# EAGLE board SmartGarden (EAGLE 9.6.2)
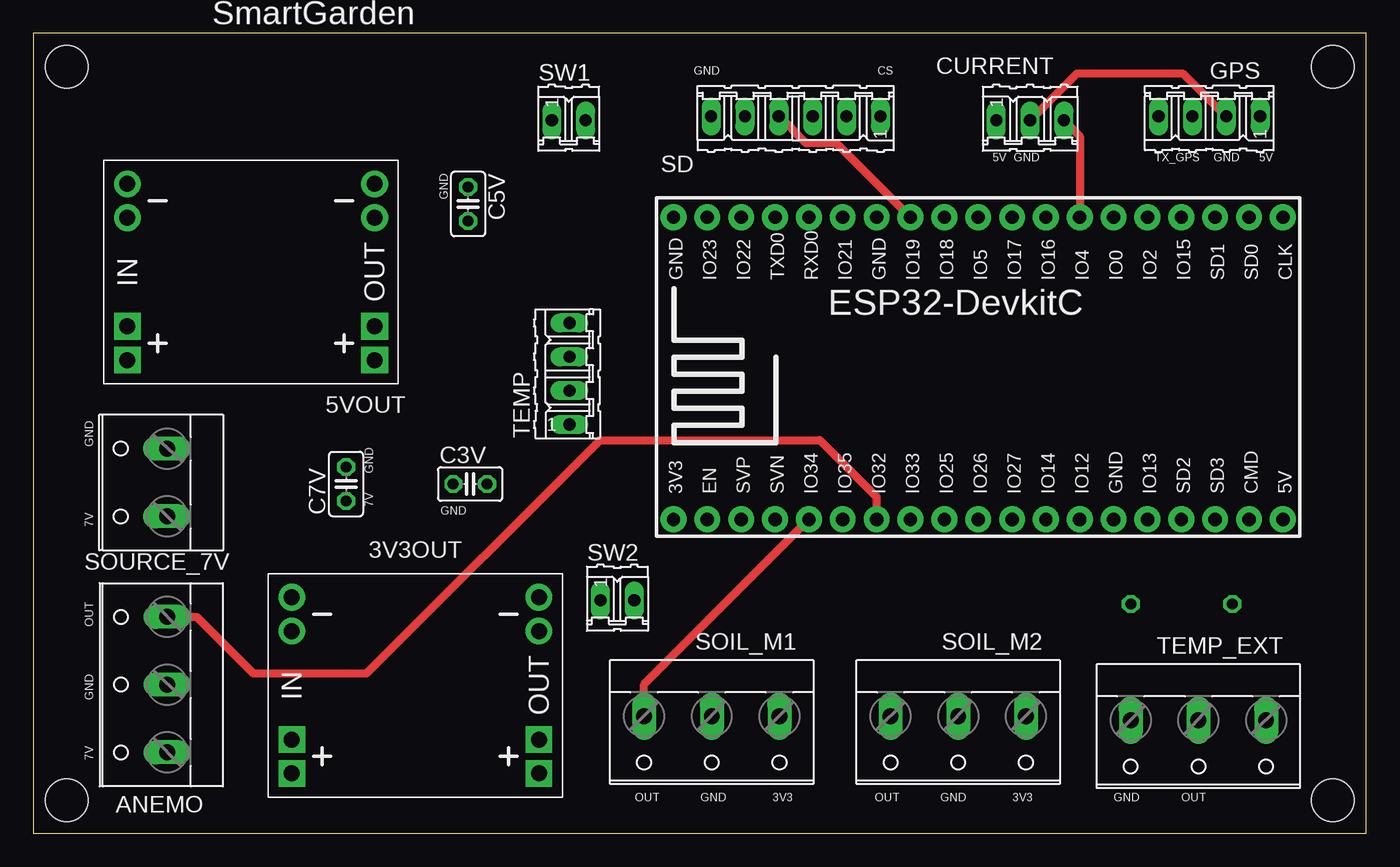
[diagram p0: board, top side]
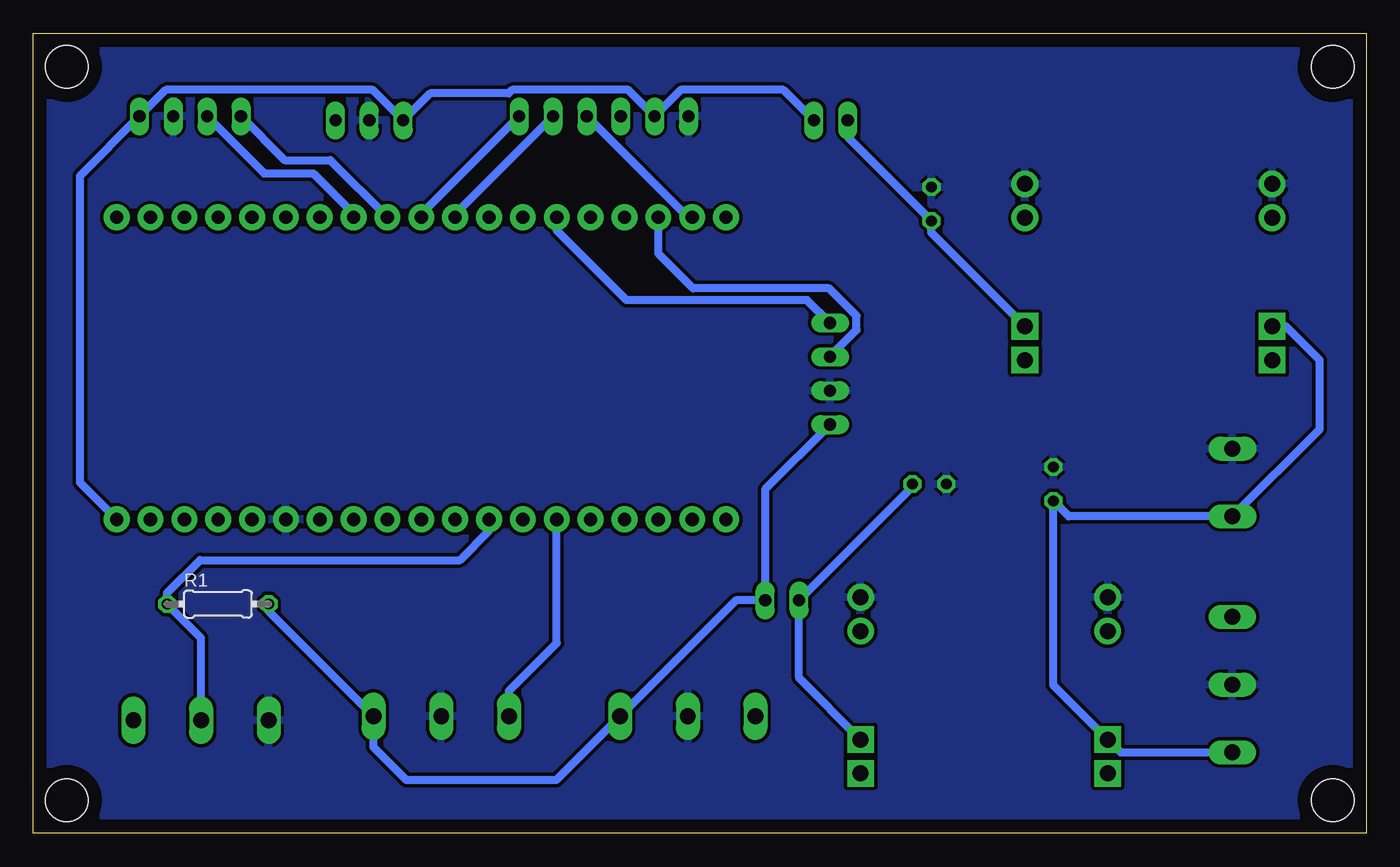
[diagram p1: board, bottom side, seen from below]

Size 100 x 60 mm. Coordinates in mm from the lower left corner, seen from the top.
Outline: 0,0 100,0 100,60 0,60 0,0
Copper layers (1*16): Top 0.035mm / dielectric 1.5mm / Bottom 0.035mm
Design rules "default": minimum track width 6mil, minimum drill 0.35mm, track to track 6mil, track to pad 6mil, pad to pad 6mil, via to via 6mil, smd to smd 6mil, copper to edge 40mil, drill to drill 6mil, minimum pad ring 10mil, minimum via ring 8mil, stop-mask expansion 4mil, vias tented up to drill 0mil, thermal gap 10mil
Net classes: 0 default: width 0.305 mm, drill 0.508 mm, clearance 0.254 mm
Holes 3.2 mm at 2.5,2.5 2.5,57.5 97.5,57.5 97.5,2.5

## Footprints (pad centres in the part's own frame; a part is rotated, then mirrored left to right if it is on the bottom)
DC-DC-STEP-DOWN-MP1584 = drill 1.2 pad 2 square: IN+.1 -9.271,-4.064; IN+.2 -9.271,-6.604; OUT+.1 9.271,-4.064; OUT+.2 9.271,-6.604 | drill 1.2 pad 2: IN-.1 -9.271,6.604; IN-.2 -9.271,4.064; OUT-.1 9.271,6.604; OUT-.2 9.271,4.064
W237-3E = drill 1.194 long: 1 -5.08,-0.635; 2 0,-0.635; 3 5.08,-0.635
C025-025X050 = drill 0.813 octagon: 1 -1.27,0; 2 1.27,0
03P = drill 0.914 long: 1 -2.54,0; 2 0,0; 3 2.54,0
ESP32-DEVKITC = drill 1 pad 1.93: 1 -22.87,-11.42; 2 -20.33,-11.42; 3 -17.79,-11.42; 4 -15.25,-11.42; 5 -12.71,-11.42; 6 -10.17,-11.42; 7 -7.63,-11.42; 8 -5.09,-11.42; 9 -2.55,-11.42; 10 -0.01,-11.42; 11 2.53,-11.42; 12 5.07,-11.42; 13 7.61,-11.42; 14 10.15,-11.42; 15 12.69,-11.42; 16 15.23,-11.42; 17 17.77,-11.42; 18 20.31,-11.42; 19 22.85,-11.42; 20 22.85,11.23; 21 20.31,11.23; 22 17.77,11.23; 23 15.23,11.23; 24 12.69,11.23; 25 10.15,11.23; 26 7.61,11.23; 27 5.07,11.23; 28 2.53,11.23; 29 -0.01,11.23; 30 -2.55,11.23; 31 -5.09,11.23; 32 -7.63,11.23; 33 -10.17,11.23; 34 -12.71,11.23; 35 -15.25,11.23; 36 -17.79,11.23; 37 -20.33,11.23; 38 -22.87,11.23
04P = drill 0.914 long: 1 -3.81,0; 2 -1.27,0; 3 1.27,0; 4 3.81,0
0204/7 = drill 0.813 octagon: 1 -3.81,0; 2 3.81,0
06P = drill 0.914 long: 1 -6.35,0; 2 -3.81,0; 3 -1.27,0; 4 1.27,0; 5 3.81,0; 6 6.35,0
W237-132 = drill 1.194 long: 1 -2.54,-0.635; 2 2.54,-0.635
02P = drill 0.914 long: 1 -1.27,0; 2 1.27,0

## Placement (x,y rotation side)
3V3OUT  DC-DC-STEP-DOWN-MP1584  [DC-DC-STEP-DOWN-MP1584]  28.66,11.1 0 top
5VOUT  DC-DC-STEP-DOWN-MP1584  [DC-DC-STEP-DOWN-MP1584]  16.33,42.1 0 top
ANEMO  [W237-3E]  9.41,11.15 90 top
C3V  [C025-025X050]  32.77,26.2 0 top
C5V  [C025-025X050]  32.62,47.2 270 top
C7V  [C025-025X050]  23.47,26.2 90 top
CURRENT  [03P]  74.79,53.47 0 top
ESP32  ESP32DEVKITC  [ESP32-DEVKITC]  70.9,34.97 0 top
GPS  [04P]  88.23,53.77 180 top
R1  [0204/7]  86.15,17.2 0 bottom
SD  [06P]  57.2,53.77 180 top
SOIL_M1  [W237-3E]  50.9,8.15 180 top
SOIL_M2  [W237-3E]  69.39,8.15 180 top
SOURCE_7V  [W237-132]  9.4,26.31 90 top
SW1  [02P]  40.17,53.47 0 top
SW2  [02P]  43.82,17.47 0 top
TEMP  [04P]  40.22,34.47 90 top
TEMP_EXT  [W237-3E]  87.41,7.85 180 top

## Library data of the parts
3V3OUT 5VOUT = diy-modules
ANEMO SOIL_M1 SOIL_M2 SOURCE_7V TEMP_EXT = con-wago-508; OC_FARNELL: unknown; OC_NEWARK: unknown
C3V C5V C7V = rcl; SPICEPREFIX: C
CURRENT GPS SD SW1 SW2 TEMP = con-amp-quick; OC_FARNELL: unknown; OC_NEWARK: unknown
ESP32 = ESP32
R1 = rcl; SPICEPREFIX: R

## Nets
7V: 3V3OUT.IN+.1 5VOUT.IN+.1 ANEMO.1 C7V.1 SOURCE_7V.1
ANEM: ANEMO.3 ESP32.7
CLK: ESP32.30 SD.2
CS: ESP32.29 SD.1
CURRENT: CURRENT.3 ESP32.26
GND: 3V3OUT.IN-.1 3V3OUT.OUT-.1 5VOUT.IN-.1 5VOUT.OUT-.1 ANEMO.2 C3V.1 C5V.1 C7V.2 CURRENT.2 ESP32.14 GPS.2 SD.6 SOIL_M1.2 SOIL_M2.2 SOURCE_7V.2 TEMP.2 TEMP_EXT.3
MISO: ESP32.31 SD.4
MOSI: ESP32.37 SD.3
N$2: 3V3OUT.OUT+.1 C3V.2 SW2.1
N$3: 5VOUT.OUT+.1 C5V.2 SW1.1
OUT3V+: R1.2 SOIL_M1.1 SOIL_M2.1 SW2.2 TEMP.1
OUT5V+: CURRENT.1 ESP32.19 GPS.1 SD.5 SW1.2
RX_GPS: ESP32.28 GPS.4
SCK: ESP32.36 TEMP.3
SDA: ESP32.33 TEMP.4
SOIL1: ESP32.5 SOIL_M1.3
SOIL2: ESP32.6 SOIL_M2.3
TEMP2: ESP32.8 R1.1 TEMP_EXT.2
TX_GPS: ESP32.27 GPS.3

## Tracks (layer width: path | path; a pad name or v marks a point on that pad's centre or on a via)
7V
  Bottom 0.61: ANEMO.1 18.42,6.07 3V3OUT.IN+.1 23.47,11.12 C7V.1 22.31,23.77 SOURCE_7V.1 3.5,30.3 3.5,35.5 6.04,38.04 5VOUT.IN+.1
ANEM
  Top 0.61: ANEMO.3 12.27,16.23 16.5,12 25,12 42.5,29.5 59,29.5 63.27,25.23 ESP32.7
CLK
  Bottom 0.61: SD.2 68.35,46.43 ESP32.30
CS
  Bottom 0.61: SD.1 70.89,46.43 ESP32.29
CURRENT
  Top 0.61: CURRENT.3 78.51,52.29 ESP32.26
GND
  Top 0.61: GPS.2 89.47,53.77 86.24,57 78.32,57 CURRENT.2
  pour Bottom: -1,62.5 104.5,62.5 104.5,61 104.5,-5.5 100,-5.5 -3.5,-5.5 -3.5,-5 -3.5,62.5
MISO
  Top 0.61: SD.4 55.96,53.77 57.94,51.79 60.22,51.79 ESP32.31
  Bottom 0.61: 65.81,46.43 ESP32.31
MOSI
  Bottom 0.61: SD.3 50.9,46.2 ESP32.37
N$2
  Bottom 0.61: 3V3OUT.OUT+.1 42.55,11.65 SW2.1 34.04,25.98 C3V.2
N$3
  Bottom 0.61: 5VOUT.OUT+.1 32.62,45.05 C5V.2 38.9,52.21 SW1.1
OUT3V+
  Bottom 0.61: R1.2 82.34,16.66 SOIL_M2.1 74.47,6.47 72,4 60.77,4 SOIL_M1.1 47.3,17.47 SW2.2 45.09,25.79 TEMP.1
OUT5V+
  Bottom 0.61: SW1.2 43.72,55.75 51.41,55.75 SD.5 55.37,55.75 64.08,55.75 64.33,55.5 70.22,55.5 CURRENT.1 74.53,55.75 90.06,55.75 GPS.1 96.5,49.31 96.5,26.3 ESP32.19
RX_GPS
  Bottom 0.61: GPS.4 81.15,50.5 77.73,50.5 ESP32.28
SCK
  Bottom 0.61: TEMP.3 40.22,35.77 38.24,37.75 38.24,38.81 40.3,40.86 50.5,40.86 53.11,43.47 ESP32.36
SDA
  Bottom 0.61: TEMP.4 41.94,40 55.5,40 60.73,45.23 ESP32.33
SOIL1
  Top 0.61: SOIL_M1.3 45.82,11.18 ESP32.5
SOIL2
  Bottom 0.61: SOIL_M2.3 64.31,10.69 60.73,14.27 ESP32.6
TEMP2
  Bottom 0.61: TEMP_EXT.2 87.41,14.65 R1.1 89.96,18.04 87.5,20.5 68,20.5 65.81,22.69 ESP32.8
TX_GPS
  Bottom 0.61: GPS.3 82.69,49.5 79,49.5 75.97,46.47 ESP32.27

## Text on the board
tNames: SmartGarden | GND | CS | 5V | GND | TX_GPS | GND | 5V | GND | GND | GND | 7V | GND | 7V | OUT | GND | 7V | OUT | GND | 3V3 | OUT | GND | 3V3 | GND | OUT
201bmp: /home/alejo/Downloads/PCB2(1).bmp